# EAGLE board OpenPCR-combined-blockfront (EAGLE 5.11)
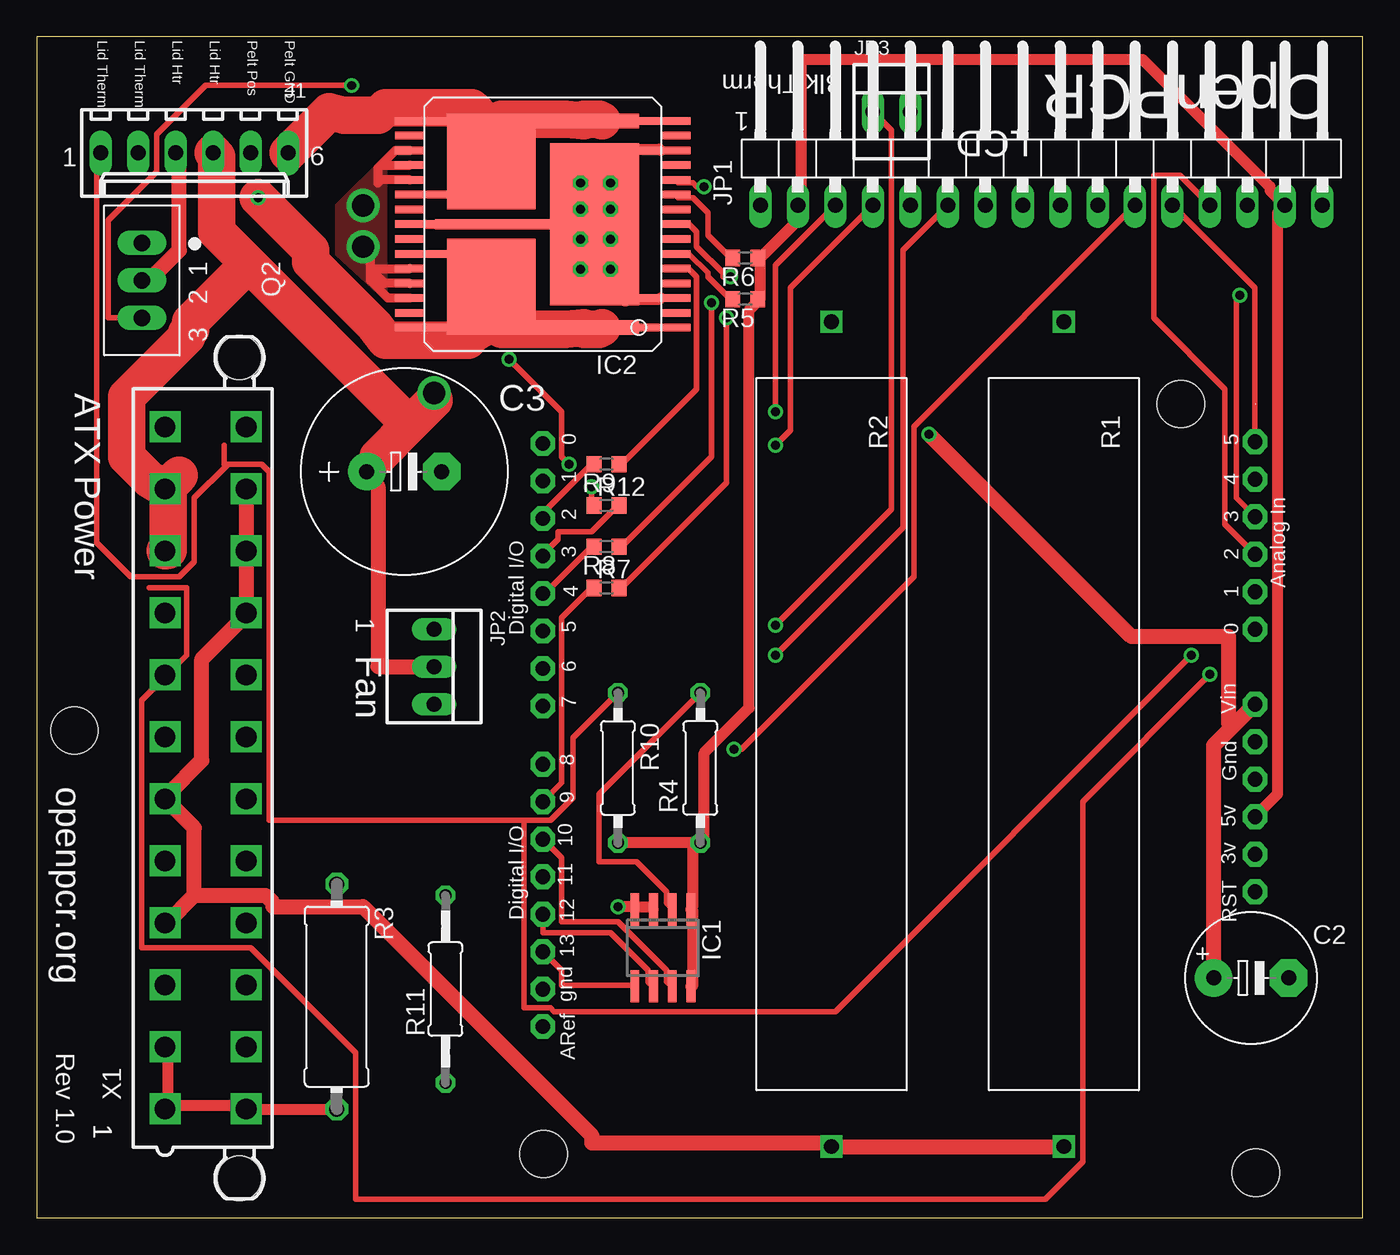
[diagram p0: board, top side]
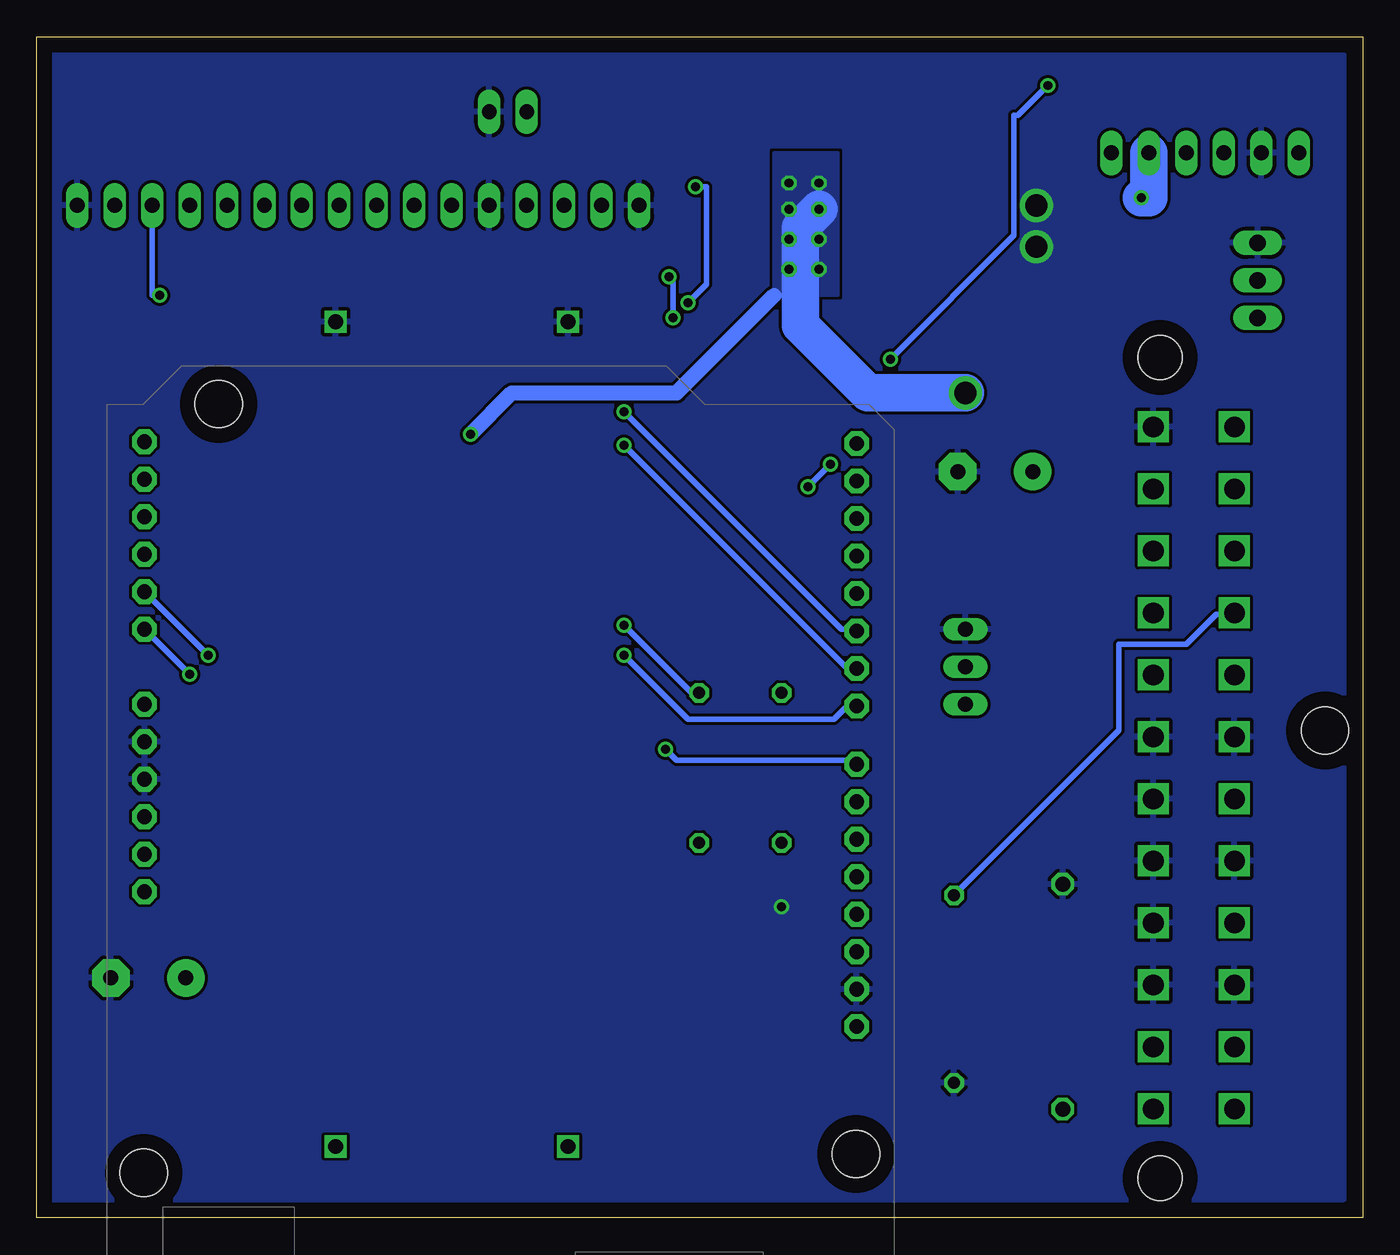
[diagram p1: board, bottom side, seen from below]

Size 89.84 x 80 mm. Coordinates in mm from the lower left corner, seen from the top.
Outline: 0,0 89.84,0 89.84,80 0,80 0,0
Copper layers (1*16): Top 0.035mm / dielectric 1.5mm / Bottom 0.035mm
Design rules "default": minimum track width 10mil, minimum drill 24mil, track to track 8mil, track to pad 8mil, pad to pad 8mil, via to via 8mil, smd to smd 8mil, copper to edge 40mil, drill to drill 8mil, minimum pad ring 10mil, minimum via ring 8mil, stop-mask expansion 4mil, vias tented up to drill 0mil, thermal gap 10mil
Net classes: 0 default: width 0.381 mm; 1 2A: width 0.762 mm; 2 8A: width 2.54 mm; 3 3A: width 1.016 mm
Holes 3.2 mm at 2.54,33.02

## Footprints (pad centres in the part's own frame; a part is rotated, then mirrored left to right if it is on the bottom)
E5-8,5 = drill 1.016 pad 2.54 round: + -2.54,0 | drill 1.016 pad 2.54 octagon: - 2.54,0
E5-13 = drill 1.016 pad 2.54 round: + -2.54,0 | drill 1.016 pad 2.54 octagon: - 2.54,0
SO-08 = smd 0.6 x 2.2: 1 -1.905,-2.6; 2 -0.635,-2.6; 3 0.635,-2.6; 4 1.905,-2.6; 5 1.905,2.6; 6 0.635,2.6; 7 -0.635,2.6; 8 -1.905,2.6
MULTIPOWERSO-30 = smd 0.508 x 12: 1 -7,-4; 15 7,-4; 16 7,4; 30 -7,4 | smd 0.508 x 2: 2 -6,-9; 4 -4,-9; 5 -3,-9; 6 -2,-9; 7 -1,-9; 8 0,-9; 9 1,-9; 10 2,-9; 11 3,-9; 12 4,-9; 14 6,-9; 17 6,9; 18 5,9; 19 4,9; 20 3,9; 22 1,9; 24 -1,9; 26 -3,9; 27 -4,9; 28 -5,9; 29 -6,9 | smd 0.508 x 4: 3 -5,-8; 13 5,-8; 21 2,8; 23 0,8; 25 -2,8 | smd 6.5 x 6: OUTA -4.25,3.5; OUTB 4.25,3.5 | smd 1 x 7.5: OUTA@1 -7,-2.755; OUTB@1 7,-2.755 | smd 11 x 6: VCC 0,-3.5 | smd 0.65 x 8.3: VCC@1 0,3.145
6410-06 = drill 1.016 long: 1 6.35,0; 2 3.81,0; 3 1.27,0; 4 -1.27,0; 5 -3.81,0; 6 -6.35,0
1X16/90 = drill 1.016 long: 1 -19.05,-3.81; 2 -16.51,-3.81; 3 -13.97,-3.81; 4 -11.43,-3.81; 5 -8.89,-3.81; 6 -6.35,-3.81; 7 -3.81,-3.81; 8 -1.27,-3.81; 9 1.27,-3.81; 10 3.81,-3.81; 11 6.35,-3.81; 12 8.89,-3.81; 13 11.43,-3.81; 14 13.97,-3.81; 15 16.51,-3.81; 16 19.05,-3.81
22-23-2031 = drill 1 long: 1 -2.54,0; 2 0,0; 3 2.54,0
22-23-2021 = drill 1 long: 1 -1.27,0; 2 1.27,0
TO202 = drill 1.118 long: 1 -2.54,-5.08; 2 0,-5.08; 3 2.54,-5.08
PR1 = drill 1 square: 1 -27.94,0; 2 27.94,0
0414/15 = drill 1.016 octagon: 1 -7.62,0; 2 7.62,0
0207/10 = drill 0.813 octagon: 1 -5.08,0; 2 5.08,0
R0603 = smd 1 x 1.1: 1 -0.85,0; 2 0.85,0
0207/12 = drill 0.813 octagon: 1 -6.35,0; 2 6.35,0
ARDUINO = drill 1 pad 1.676 octagon: 3V 36.068,2.54; 5V 38.608,2.54; A0 51.308,2.54; A1 53.848,2.54; A2 56.388,2.54; A3 58.928,2.54; A4 61.468,2.54; A5 64.008,2.54; AREF 24.384,50.8; D0 63.881,50.8; D1 61.341,50.8; D2 58.801,50.8; D3 56.261,50.8; D4 53.721,50.8; D5 51.181,50.8; D6 48.641,50.8; D7 46.101,50.8; D8 42.164,50.8; D9 39.624,50.8; D10 37.084,50.8; D11 34.544,50.8; D12 32.004,50.8; D13 29.464,50.8; GND 26.924,50.8; GND1 43.688,2.54; GND2 41.148,2.54; RESET 33.528,2.54; VIN 46.228,2.54 | hole 3.2: 15.758,50.754; 66.558,7.574; 14.488,2.494
ATX24 = drill 1.4 square: 1 23.1,-2.75; 2 18.9,-2.75; 3 14.7,-2.75; 4 10.5,-2.75; 5 6.3,-2.75; 6 2.1,-2.75; 7 -2.1,-2.75; 8 -6.3,-2.75; 9 -10.5,-2.75; 10 -14.7,-2.75; 11 -18.9,-2.75; 12 -23.1,-2.75; 13 23.1,2.75; 14 18.9,2.75; 15 14.7,2.75; 16 10.5,2.75; 17 6.3,2.75; 18 2.1,2.75; 19 -2.1,2.75; 20 -6.3,2.75; 21 -10.5,2.75; 22 -14.7,2.75; 23 -18.9,2.75; 24 -23.1,2.75 | hole 3: 27.8,2.29; -27.8,2.29

## Placement (x,y rotation side)
C2  [E5-8,5]  82.3,16.26 0 top
C3  [E5-13]  24.89,50.55 0 top
IC1  MCP3551SN  [SO-08]  42.42,18.29 180 top
IC2  VNH3SP30  [MULTIPOWERSO-30]  34.29,67.31 90 top
J1  22-27-2061-06  [6410-06]  10.67,72.14 180 top
JP1  [1X16/90]  68.07,72.39 0 top
JP2  22-23-2031  [22-23-2031]  26.92,37.34 270 top
JP3  22-23-2021  [22-23-2021]  57.91,74.93 0 top
Q2  BSS97  [TO202]  12.19,63.5 270 top
R1  4.7  [PR1]  69.6,32.77 270 top
R2  4.7  [PR1]  53.85,32.77 270 top
R3  16 Ohms  [0414/15]  20.32,14.99 270 top
R4  [0207/10]  44.96,30.48 90 top
R5  3.3k  [R0603]  48.01,62.23 180 top
R6  3.3k  [R0603]  48.01,65.02 180 top
R7  1k  [R0603]  38.61,42.67 0 top
R8  1k  [R0603]  38.61,45.47 180 top
R9  1k  [R0603]  38.61,51.05 180 top
R10  [0207/10]  39.37,30.48 270 top
R11  51 Ohms  [0207/12]  27.69,15.49 90 top
R12  1k  [R0603]  38.61,48.26 0 top
U$3  ARDUINODUEMILANOVE  [ARDUINO]  85.09,-11.43 90 top
X1  ATX24  [ATX24]  11.43,30.48 270 top

## Library data of the parts
C2 C3 R5-R9 R11 R12 = rcl
IC1 = microchip; MPN: MCP3551-E/SN; OC_FARNELL: 1084625; OC_NEWARK: 97K4494
IC2 = st-microelectronics; MPN: VNH3SP30-E; OC_FARNELL: 1739420; OC_NEWARK: 33R1486
J1 = con-molex; OC_FARNELL: unknown; OC_NEWARK: unknown
JP1 = pinhead
JP2 = con-molex; MF: MOLEX; MPN: 22-23-2031; OC_FARNELL: 1462950; OC_NEWARK: 30C0862
JP3 = con-molex; MF: MOLEX; MPN: 22-23-2021; OC_FARNELL: 1462926; OC_NEWARK: 25C3832
Q2 R1 R2 U$3 = openpcr
R3 R4 R10 = resistor
X1 = openpcr; OC_FARNELL: unknown; OC_NEWARK: unknown

## Nets
3V: U$3.3V
+3.3V [2A]: R3.2 X1.1 X1.2 X1.13
+5V [3A]: R1.2 R2.2 X1.4 X1.6 X1.21 X1.22 X1.23
+5VREG [2A]: IC1.1 IC1.8 JP1.2 JP1.15 R4.1 R5.1 R6.1 R10.2 U$3.5V
+5VSTBY: R11.2 X1.9
+12V1 [8A]: C2.+ C3.+ IC2.3 IC2.13 IC2.23 IC2.VCC IC2.VCC@1 J1.4 JP2.2 U$3.VIN X1.10 X1.11
GND1 [2A]: C2.- C3.- IC1.3 IC1.4 IC2.18 IC2.19 IC2.20 IC2.26 IC2.27 IC2.28 J1.2 JP1.1 JP1.5 JP1.16 JP2.1 JP3.2 Q2.1 R1.1 R2.1 R3.1 R11.1 U$3.GND U$3.GND1 U$3.GND2 X1.3 X1.5 X1.7 X1.15 X1.16 X1.17 X1.18 X1.19 X1.24
N$1: U$3.A0 X1.8
N$2: JP1.3 U$3.D5
N$3: JP1.4 U$3.D6
N$4: JP1.14 U$3.A3
N$8: R12.2 U$3.D3
N$10: JP1.13 U$3.A2
N$11: JP1.6 U$3.D7
N$12: JP1.12 U$3.A5
N$14: IC1.5 U$3.D13
N$16: IC2.8 R7.2
N$17: IC2.11 R8.1
N$18 [3A]: J1.3 Q2.2
N$19: IC2.5 R9.1
N$20: JP1.11 U$3.D8
N$23: IC1.2 JP3.1 R4.2
N$25 [8A]: IC2.1 IC2.25 IC2.30 IC2.OUTA IC2.OUTA@1 J1.5
N$27: IC1.6 U$3.D12
N$29: IC1.7 U$3.D10
N$30: R7.1 U$3.D9
N$31: R8.2 U$3.D4
N$32 [8A]: IC2.15 IC2.16 IC2.21 IC2.OUTB IC2.OUTB@1 J1.6
N$33: R9.2 U$3.D2
N$34: IC2.6 R5.2
N$35: IC2.10 R6.2
N$37: J1.1 R10.1 U$3.A1
T1: Q2.3 R12.1

## Tracks (layer width: path | path; a pad name or v marks a point on that pad's centre or on a via)
+3.3V
  Top 0.762: X1.2 8.89,11.43 8.89,7.62 X1.1 9.14,7.62 13.97,7.62 X1.13 14.22,7.37 R3.2
+5V
  Top 1.016: X1.22 14.22,44.96 | X1.22 14.22,45.47 | X1.22 14.22,44.45 14.22,41.15 X1.21 13.97,40.64 11.18,37.85 11.18,30.99 8.89,28.7 X1.6 8.89,28.19 10.67,26.42 10.67,21.84 | X1.23 14.22,49.28 14.22,45.97 X1.22 | R1.2 R2.2 53.59,5.08 37.59,5.08 37.59,5.59 22.1,21.08 16,21.08 16,21.34 15.49,21.84 10.67,21.84 | 10.67,21.84 8.89,20.07 X1.4
+5VREG
  Top 0.762: U$3.5V 84.07,28.7 84.07,68.07 JP1.15 83.57,69.6 83.57,69.85 74.93,78.49 51.82,78.49 51.82,68.83 JP1.2 51.56,67.56 49.28,65.28 R6.1 49.02,65.02 49.02,62.23 R5.1 48.77,61.98 48.26,61.47 48.26,34.54 45.21,31.5 45.21,25.65 R4.1 | IC1.8 44.45,15.75 44.45,20.83 IC1.1 44.45,21.08 44.45,25.15 R4.1 | R4.1 R10.2
+5VSTBY
  Bottom 0.381: R11.2 16.51,33.02 16.51,38.86 11.94,38.86 9.91,40.89 8.89,40.89 X1.9
+12V1  (via drill 0.6, 0.61, 1.5)
  Top 0.61: 38.27,72.31 38.1,72.14 38.1,71.12 38.1,69.85 | 39.8,62.31 39.12,62.99 37.34,64.77 37.34,65.28 | IC2.23 IC2.VCC@1 IC2.VCC 37.79,66.35 38.1,66.04
  Top 0.762: 39.88,62.23 42.16,62.23 IC2.3 | IC2.13 42.16,72.39 38.35,72.39 IC2.VCC
  Top 1.016: IC2.VCC 38.1,71.12 | IC2.VCC 39.88,62.23 | IC2.VCC 39.12,62.99 | IC2.VCC v38.86,64.26 | 26.92,55.37 v26.92,55.88 | 23.11,51.56 C3.+ 23.11,49.53 23.11,37.34 JP2.2 | 81.03,33.27 79.76,32 C2.+ | 81.03,33.27 U$3.VIN | v60.45,53.09 74.17,39.37 80.77,39.37 80.77,33.53 81.03,33.27
  Top 2.54: 25.27,53.72 23.11,51.56 | 25.27,53.72 26.92,55.37 | X1.10 8.89,45.21 8.89,49.28 X1.11 | X1.11 9.65,50.29 | J1.4 12.19,71.88 12.19,66.8 14.35,64.64 | 14.35,64.64 25.27,53.72 | X1.11 7.62,50.04 6.1,51.56 6.1,55.63 10.16,59.69 10.16,59.94 10.41,60.2 10.41,60.71 14.35,64.64
  Bottom 1.016: 39.88,62.48 46.48,55.88 57.66,55.88 v60.45,53.09
  Bottom 2.54: v26.92,55.88 33.53,55.88 38.1,60.45 38.1,67.06 v36.83,68.33
  other vias: 36.83,70.1 36.83,70.1 38.86,70.1 38.86,68.33 36.83,66.29 38.86,66.29 36.83,64.26
  pour Bottom: 35.56,72.14 39.88,72.14 39.88,62.48 35.56,62.48
GND1  (via drill 0.61, 1.5)
  Top 0.61: IC2.18 24.3,72.31 23.3,71.31 | IC2.20 23.32,70.31 23.11,70.1 23.11,71.12 23.3,71.31 | 23.3,71.31 IC2.19 | IC2.26 22.65,64.31 22.61,64.26 23.56,63.31 IC2.27 | IC2.28 23.8,62.31 22.61,63.5 22.61,65.28 v22.1,65.79
  Top 0.762: IC1.3 41.66,21.08 40.64,21.08 IC1.4 40.39,21.08 v39.37,21.08
  other vias: 22.1,68.58
  pour Bottom (rank 3): 1.27,78.74 88.9,78.74 88.9,1.27 1.27,1.27
  pour Top: 20.32,65.28 20.32,68.58 23.62,71.88 23.62,62.23
N$1  (via drill 0.61)
  Top 0.381: 7.62,42.67 10.16,42.67 10.16,38.1 8.89,36.83 X1.8 8.64,36.58 7.11,35.05 7.11,18.29 14.48,18.29 21.59,11.18 21.59,1.27 68.33,1.27 70.87,3.81 70.87,28.19 v79.5,36.83
  Bottom 0.381: v79.5,36.83 U$3.A0
N$2  (via drill 0.61)
  Top 0.381: JP1.3 50.04,64.52 v50.04,54.61
  Bottom 0.381: v50.04,54.61 35.31,39.88 34.29,39.88 U$3.D5
N$3  (via drill 0.61)
  Top 0.381: JP1.4 51.05,62.99 51.05,53.34 v50.04,52.32
  Bottom 0.381: v50.04,52.32 35.05,37.34 34.29,37.34 U$3.D6
N$4  (via drill 0.61)
  Top 0.381: v81.53,62.48 81.28,62.23 81.28,48.77 U$3.A3
  Bottom 0.381: JP1.14 82.04,62.48 v81.53,62.48
N$8
  Top 0.381: R12.2 39.37,48.26 37.59,46.48 35.31,46.48 35.31,45.97 34.29,44.96 U$3.D3
N$10
  Top 0.381: JP1.13 77.47,70.61 75.69,70.61 75.69,60.96 80.52,56.13 80.52,46.99 U$3.A2
N$11  (via drill 0.61)
  Top 0.381: JP1.6 58.67,65.53 58.67,46.74 v50.04,38.1
  Bottom 0.381: v50.04,38.1 45.72,33.78 35.81,33.78 35.05,34.54 34.29,34.54 U$3.D7
N$12
  Top 0.381: JP1.12 82.55,62.99 U$3.A5
N$14
  Top 0.381: U$3.D13 35.56,16.76 35.56,15.75 40.39,15.75 IC1.5
N$16  (via drill 0.61)
  Top 0.381: v46.74,60.96 46.74,49.78 39.62,42.67 R7.2 | v46.99,63.75 46.48,63.75 46.48,64.01 44.7,65.79 44.7,66.8 44.2,67.31 IC2.8
  Bottom 0.381: v46.74,60.96 46.74,63.75 v46.99,63.75
N$17  (via drill 0.61)
  Top 0.381: v45.72,61.98 45.72,51.56 39.62,45.47 R8.1 | v45.21,69.85 44.7,69.85 44.45,70.1 43.43,70.1 IC2.11
  Bottom 0.381: v45.72,61.98 44.45,63.25 44.45,69.85 v45.21,69.85
N$18
  Top 1.016: J1.3 9.65,71.88 9.65,65.53 7.62,63.5 Q2.2
N$19
  Top 0.381: R9.1 39.62,51.05 44.7,56.13 44.7,63.75 44.2,64.26 43.43,64.26 IC2.5
N$20  (via drill 0.61)
  Top 0.381: JP1.11 59.44,53.59 59.44,43.43 47.75,31.75 v47.24,31.75
  Bottom 0.381: v47.24,31.75 46.48,30.99 34.54,30.99 U$3.D8
N$23  (via drill 0.61)
  Top 0.381: R4.2 38.1,28.7 38.1,24.13 40.64,24.13 42.67,22.1 42.67,21.34 42.93,21.08 IC1.2 | v50.04,40.13 57.91,48.01 57.91,73.66 JP3.1
  Bottom 0.381: v50.04,40.13 45.47,35.56 R4.2
N$25  (via drill 0.61)
  Top 0.254: IC2.25 28.54,65.31 IC2.OUTA
  Top 2.54: IC2.1 38.1,60.2 37.08,60.2 IC2.OUTA@1 35.81,60.2 31.5,60.2 IC2.OUTA 30.73,62.99 30.73,61.47 IC2.30 29.21,59.69 29.21,59.44 23.62,59.44 22.86,60.45 18.54,64.77 18.54,65.53 v14.99,69.09
  Bottom 2.54: J1.5 14.48,69.09 v14.99,69.09
N$27
  Top 0.381: U$3.D12 34.29,19.3 38.86,19.3 41.4,16.76 41.4,16 41.66,15.75 IC1.6
N$29
  Top 0.381: U$3.D10 35.56,24.38 35.56,20.07 39.37,20.07 42.67,16.76 42.67,16 42.93,15.75 IC1.7
N$30
  Top 0.381: U$3.D9 35.56,29.46 35.56,40.64 37.59,42.67 R7.1
N$31
  Top 0.381: R8.2 37.59,45.47 34.29,42.16 U$3.D4
N$32
  Top 0.254: 30.73,71.63 30.73,69.6 30.48,69.34 26.32,69.34 IC2.21
  Top 2.54: IC2.15 38.1,74.42 37.08,74.42 IC2.OUTB@1 35.81,74.42 31.5,74.42 IC2.OUTB 30.73,71.63 30.73,73.15 IC2.16 29.46,75.18 23.62,75.18 23.11,74.68 20.83,74.68 19.81,74.93 J1.6
N$33
  Top 0.381: R9.2 37.59,51.05 34.29,47.75 U$3.D2
N$34
  Top 0.381: R5.2 46.99,62.23 45.47,63.75 45.47,64.01 44.2,65.28 43.43,65.28 IC2.6
N$35
  Top 0.381: R6.2 46.99,65.02 45.47,66.55 45.47,68.07 44.45,69.09 43.43,69.09 IC2.10
N$37  (via drill 0.61)
  Top 0.381: 12.83,50.93 12.95,51.05 15.24,51.05 15.75,50.55 15.75,26.92 33.02,26.92 | 12.83,50.93 10.67,48.77 10.67,44.45 9.65,43.43 6.35,43.43 4.06,45.72 4.06,71.88 J1.1 | R10.1 36.32,32.51 36.32,28.45 34.8,26.92 33.02,26.92 | v78.23,38.1 54.1,13.97 35.05,13.97 34.8,14.22 33.02,14.22 33.02,26.92 | 12.7,52.32 12.7,51.05 12.83,50.93
  Bottom 0.381: v78.23,38.1 U$3.A1
T1  (via drill 0.61)
  Top 0.381: v32,58.17 35.56,54.61 35.56,51.56 v36.07,51.05 | v37.59,49.53 37.59,48.26 R12.1 | Q2.3 4.83,60.96 4.83,67.56 8.13,70.87 8.13,73.41 11.43,76.71 v21.34,76.71
  Bottom 0.381: v32,58.17 23.62,66.55 23.62,74.68 23.37,74.68 v21.34,76.71 | v36.07,51.05 v37.59,49.53

## Text on the board
_tsilk: Lid Therm | Lid Therm | Lid Htr | Lid Htr | Pelt Pos | Pelt GND | Blk Therm | OpenPCR | 1 | LCD | ATX Power | 1 | Fan | openpcr.org | Rev 1.0 | 1 | 1